# EAGLE board PCB (EAGLE 9.7.0)
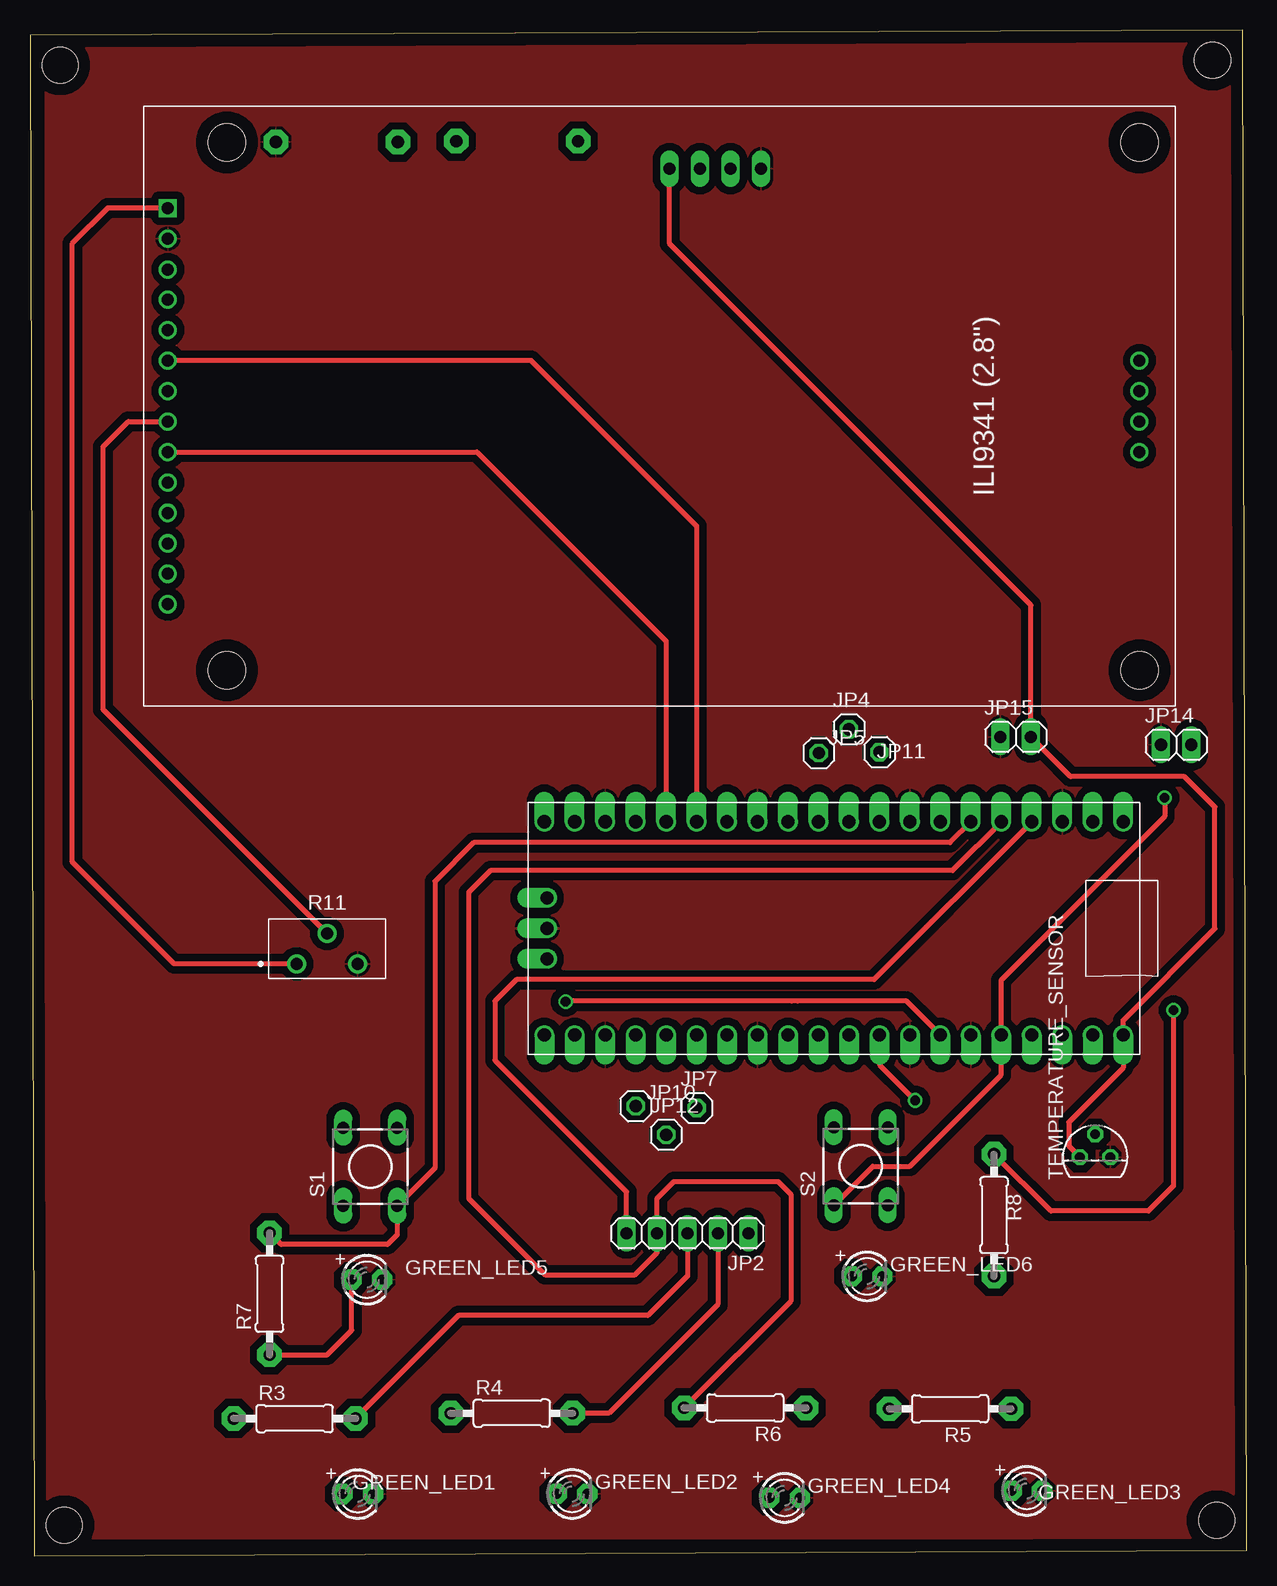
[diagram p0: board, top side]
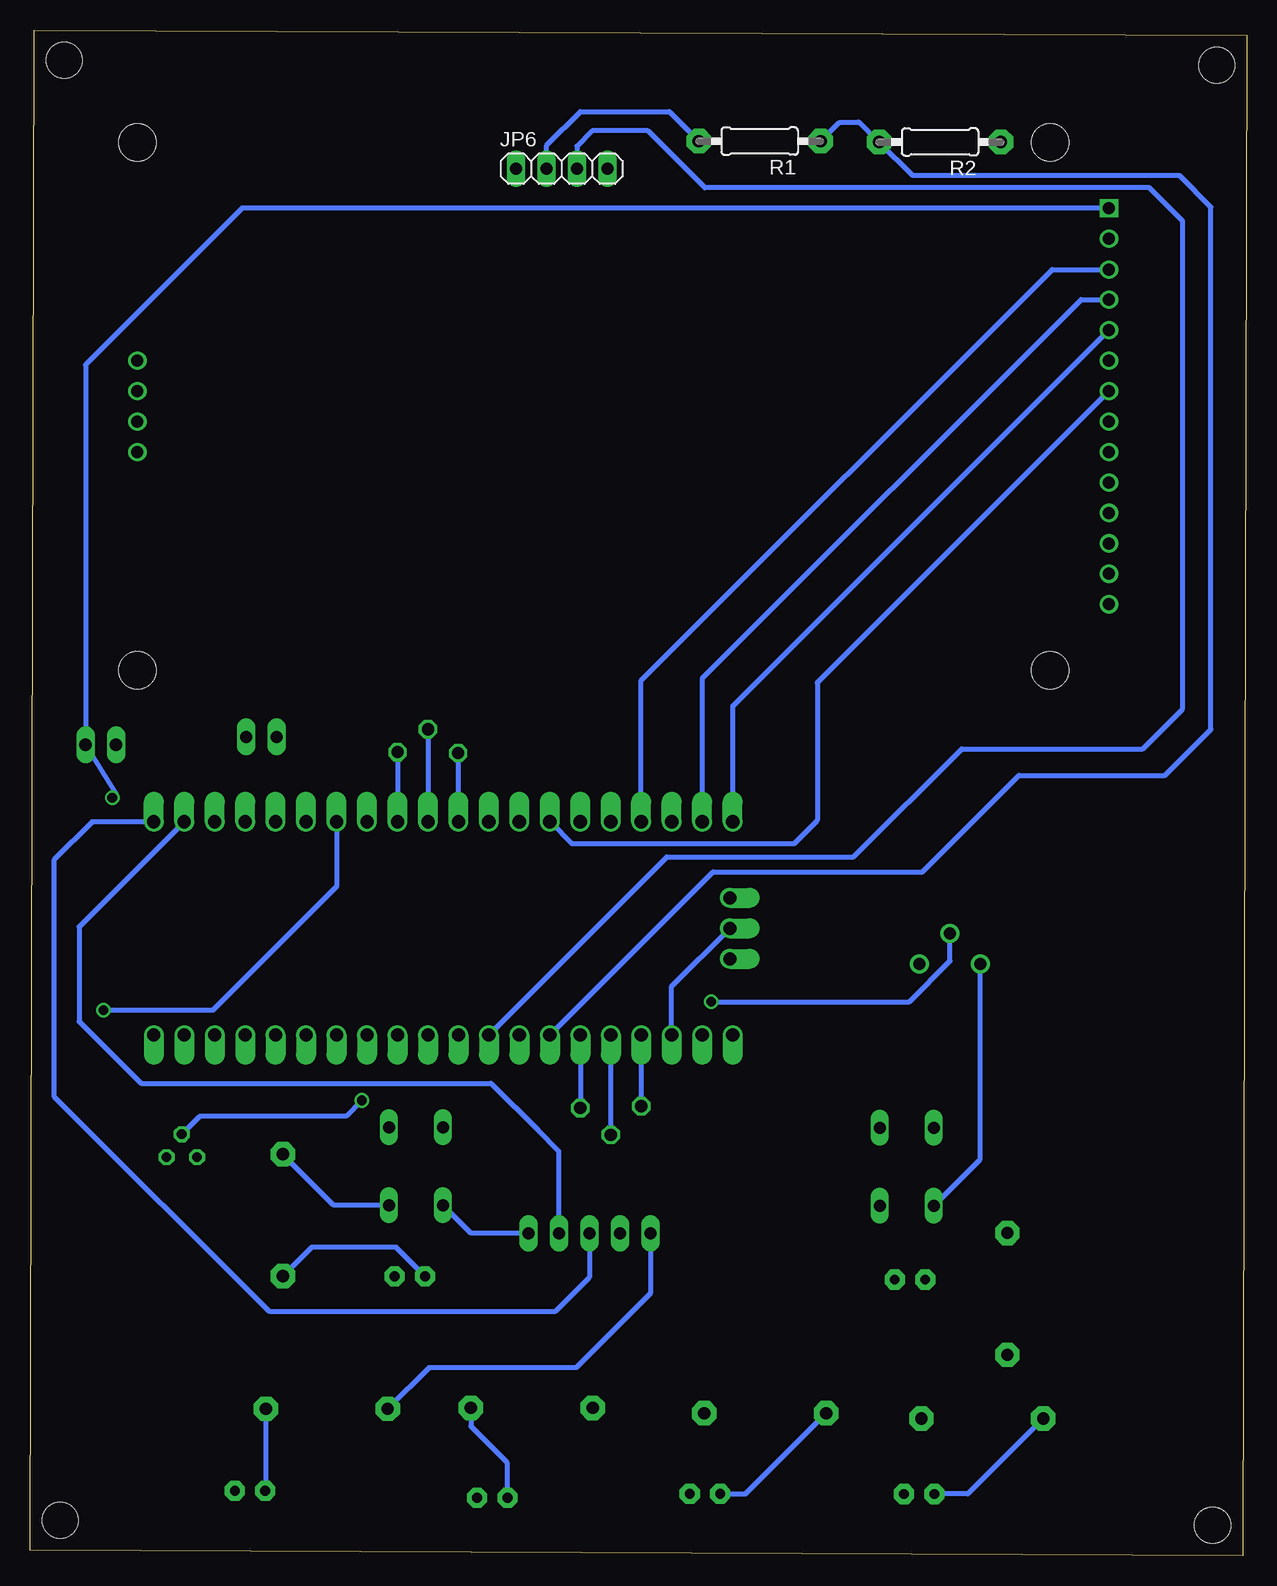
[diagram p1: board, bottom side, seen from below]

Size 101.45 x 127.18 mm. Coordinates in mm from the lower left corner, seen from the top.
Outline: 0.36,0 101.45,0.43 101.1,127.18 0,126.75 0.36,0
Copper layers (1*16): Top / Bottom
Stack-up 2 Layer Stack: Top SilkScreen Epoxy Ink / Top SolderMask User Defined 0.0254mm Dk 4.3 / Top Surface Finish Lead-Free 0.02mm / Top CuFoil:007 0.035mm / Dielectric-1 User Defined 0.79mm / Bottom CuFoil:007 0.035mm / Bottom Surface Finish Lead-Free 0.02mm / Bottom SolderMask User Defined 0.0254mm Dk 4.3 / Bottom SilkScreen Epoxy Ink
Design rules "default *": minimum track width 16mil, minimum drill 32mil, track to track 24mil, track to pad 24mil, pad to pad 24mil, via to via 24mil, smd to smd 24mil, copper to edge 40mil, drill to drill 20mil, minimum pad ring 10mil, minimum via ring 8mil, stop-mask expansion 4mil, vias tented up to drill 0mil, thermal gap 10mil
Holes 3 mm at 2.52,124.24 2.86,2.53 98.93,2.94 98.59,124.65

## Footprints (pad centres in the part's own frame; a part is rotated, then mirrored left to right if it is on the bottom)
LED3MM = drill 0.813 pad 1.676 octagon: A -1.27,0; K 1.27,0
1X05 = drill 1.016 long: 1 -5.08,0; 2 -2.54,0; 3 0,0; 4 2.54,0; 5 5.08,0
1X01 = drill 1.016 octagon: 1 0,0
1X04 = drill 1.016 long: 1 -3.81,0; 2 -1.27,0; 3 1.27,0; 4 3.81,0
1X02 = drill 1.016 long: 1 -1.27,0; 2 1.27,0
ILI9341 = drill 1: CS 13.6,2; D/C 18.65,2; GND 11.03,2; LED 26.27,2; RESET 16.11,2; SCK 23.73,2; SD_CS 21.19,83; SD_MISO 26.27,83; SD_MOSI 23.73,83; SD_SCK 28.81,83; SDI(MOSI) 21.19,2; SDO(MISO) 28.81,2; T_CLK 31.35,2; T_CS 33.89,2; T_DIN 36.43,2; T_DO 38.97,2; T_IRQ 41.51,2 | drill 1 square: VCC 8.49,2 | hole 3.1: 3,6.92; 47,6.92; 47,83; 3,83
0207/10 = drill 1.016 pad 2.032 octagon: 1 -5.08,0; 2 5.08,0
PV36Y = drill 1 pad 1.564: 1 0,0; 2 2.54,2.54; 3 5.08,0
RPI_PICO_TH = drill 1.1 pad 1.6 offset: 3V3 8.89,13.97; 3V3_EN 8.89,16.51; ADC_VREF 8.89,11.43; AGND 8.89,6.35; GND@1 -8.89,19.05; GND@2 -8.89,6.35; GND@3 -8.89,-6.35; GND@4 -8.89,-19.05; GND@5 0,-23.9; GND@6 8.89,-19.05; GND@7 8.89,-6.35; GND@8 8.89,19.05; GP0 -8.89,24.13; GP1 -8.89,21.59; GP2 -8.89,16.51; GP3 -8.89,13.97; GP4 -8.89,11.43; GP5 -8.89,8.89; GP6 -8.89,3.81; GP7 -8.89,1.27; GP8 -8.89,-1.27; GP9 -8.89,-3.81; GP10 -8.89,-8.89; GP11 -8.89,-11.43; GP12 -8.89,-13.97; GP13 -8.89,-16.51; GP14 -8.89,-21.59; GP15 -8.89,-24.13; GP16 8.89,-24.13; GP17 8.89,-21.59; GP18 8.89,-16.51; GP19 8.89,-13.97; GP20 8.89,-11.43; GP21 8.89,-8.89; GP22 8.89,-3.81; GP26_A0 8.89,1.27; GP27_A1 8.89,3.81; GP28_A2 8.89,8.89; RUN 8.89,-1.27; SWCLK -2.54,-23.9; SWDIO 2.54,-23.9; VBUS 8.89,24.13; VSYS 8.89,21.59
DTS-6 = drill 1 long: 1 -3.25,2.25; 2 3.25,2.25; 3 -3.25,-2.25; 4 3.25,-2.25
TO92 = drill 0.813 octagon: 1 -1.27,0; 2 0,1.905; 3 1.27,0

## Placement (x,y rotation side)
GREEN_LED1  3MM_LED_TH  [LED3MM]  27.32,5.14 0 top
GREEN_LED2  3MM_LED_TH  [LED3MM]  45.19,5.16 0 top
GREEN_LED3  3MM_LED_TH  [LED3MM]  83.11,5.41 0 top
GREEN_LED4  3MM_LED_TH  [LED3MM]  62.92,4.83 0 top
GREEN_LED5  3MM_LED_TH  [LED3MM]  28.09,23.01 0 top
GREEN_LED6  3MM_LED_TH  [LED3MM]  69.78,23.29 0 top
JP2  PINHD-1X5  [1X05]  54.81,26.87 180 top
JP4  PINHD-1X1  [1X01]  68.28,68.88 0 top
JP5  PINHD-1X1  [1X01]  65.76,66.9 0 top
JP6  PINHD-1X4  [1X04]  57.12,115.62 0 bottom
JP7  PINHD-1X1  [1X01]  55.58,37.31 0 top
JP10  PINHD-1X1  [1X01]  50.5,37.47 0 top
JP11  PINHD-1X1  [1X01]  70.82,66.98 0 top
JP12  PINHD-1X1  [1X01]  53.04,35.08 0 top
JP14  PINHD-1X2  [1X02]  95.55,67.59 0 top
JP15  PINHD-1X2  [1X02]  82.17,68.25 0 top
LCD_SCREEN  ILI9341  [ILI9341]  9.49,120.82 270 top
R1  10K  [0207/10]  40.62,117.91 180 bottom
R2  10K  [0207/10]  25.58,117.84 180 bottom
R3  10k  [0207/10]  22.06,11.43 0 top
R4  10K  [0207/10]  40.16,11.87 0 top
R5  10K  [0207/10]  76.71,12.24 180 top
R6  10k  [0207/10]  59.62,12.32 180 top
R7  10k  [0207/10]  19.97,21.82 90 top
R8  10k  [0207/10]  80.37,28.38 90 top
R11  [PV36Y]  22.22,49.33 0 top
RASPBERRY_PI_PICO  [RPI_PICO_TH]  67.01,52.29 270 top
S1  DTS-6  [DTS-6]  28.36,32.41 90 top
S2  DTS-6  [DTS-6]  69.27,32.46 90 top
TEMPERATURE_SENSOR  LM35CZ  [TO92]  88.8,33.22 0 top

## Library data of the parts
GREEN_LED1-GREEN_LED6 R1-R8 = BASIC_Components
JP2 JP4-JP7 JP10-JP12 JP14 JP15 = Connector; CATEGORY: CONNECTOR; SUB-CATEGORY: PIN-HEADER
LCD_SCREEN = ILI9341
R11 = Resistor; CATEGORY: Resistor; DESCRIPTION: Lead Sealed Type Multiturn PV36 Series; MANUFACTURER: BOURNS; MPN: PV36Y; OPERATING_TEMPERATURE: -55 to +125 °C; PART_STATUS: Active; ROHS_COMPLIANCE: ROHS Compliant; SERIES: PV36; SUB-CATEGORY: Trimpot; TYPE: Lead Sealed
RASPBERRY_PI_PICO = RaspberryPi_Pico
S1 S2 = switch-tact
TEMPERATURE_SENSOR = lm35

## Nets
GP6: JP11.1 RASPBERRY_PI_PICO.GP6
GP7: JP4.1 RASPBERRY_PI_PICO.GP7
GP8: JP5.1 RASPBERRY_PI_PICO.GP8
GP9: RASPBERRY_PI_PICO.GP9
GP18: JP10.1 RASPBERRY_PI_PICO.GP18
GP19: JP12.1 RASPBERRY_PI_PICO.GP19
GP20: JP7.1 RASPBERRY_PI_PICO.GP20
GP26: RASPBERRY_PI_PICO.GP26_A0
GP28: LCD_SCREEN.LED R11.2 RASPBERRY_PI_PICO.GP28_A2
GP_3V3_EN: RASPBERRY_PI_PICO.3V3_EN
N$2: JP6.2 R1.2
N$5: GREEN_LED4.A R6.1
N$7: GREEN_LED3.A R5.1
N$9: GREEN_LED2.A R4.1
N$10: GREEN_LED1.A R3.1
N$12: GREEN_LED5.A R7.1
N$23: GREEN_LED6.A R8.1
PIN_RUN: RASPBERRY_PI_PICO.RUN
PUSH_BUTTON_1: R7.2 RASPBERRY_PI_PICO.GP4 S1.3
PUSH_BUTTON_2: R8.2 RASPBERRY_PI_PICO.GP5 S2.3
SWITCH_1: JP2.3 R3.2 RASPBERRY_PI_PICO.GP0
SWITCH_2: JP2.2 R4.2 RASPBERRY_PI_PICO.GP1
SWITCH_3: JP2.5 R5.2 RASPBERRY_PI_PICO.GP2
SWITCH_4: JP2.4 R6.2 RASPBERRY_PI_PICO.GP3
T_3.3V: JP2.1 JP14.2 LCD_SCREEN.VCC R11.1 RASPBERRY_PI_PICO.3V3 S1.1 S2.1
T_CS: LCD_SCREEN.CS RASPBERRY_PI_PICO.GP13
T_D/C: LCD_SCREEN.D/C RASPBERRY_PI_PICO.GP15
T_ECHO: R1.1 R2.2 RASPBERRY_PI_PICO.GP21
T_GND: GREEN_LED1.K GREEN_LED2.K GREEN_LED3.K GREEN_LED4.K GREEN_LED5.K GREEN_LED6.K JP6.1 JP14.1 JP15.1 LCD_SCREEN.GND R2.1 R11.3 RASPBERRY_PI_PICO.ADC_VREF RASPBERRY_PI_PICO.AGND RASPBERRY_PI_PICO.GND@1 RASPBERRY_PI_PICO.GND@2 RASPBERRY_PI_PICO.GND@3 RASPBERRY_PI_PICO.GND@4 RASPBERRY_PI_PICO.GND@5 RASPBERRY_PI_PICO.GND@6 RASPBERRY_PI_PICO.GND@7 RASPBERRY_PI_PICO.GND@8 TEMPERATURE_SENSOR.3
T_LCD_RESET: LCD_SCREEN.RESET RASPBERRY_PI_PICO.GP14
T_LCD_SCK: LCD_SCREEN.SCK RASPBERRY_PI_PICO.GP10
T_MISO: LCD_SCREEN.SDO(MISO) RASPBERRY_PI_PICO.GP12
T_MOSI: LCD_SCREEN.SDI(MOSI) RASPBERRY_PI_PICO.GP11
T_SCL: RASPBERRY_PI_PICO.GP17
T_SDA: RASPBERRY_PI_PICO.GP16
T_TEMP: RASPBERRY_PI_PICO.GP27_A1 TEMPERATURE_SENSOR.2
T_TRIG: JP6.3 RASPBERRY_PI_PICO.GP22
V_5V: JP6.4 JP15.2 RASPBERRY_PI_PICO.VBUS TEMPERATURE_SENSOR.1

## Tracks (layer width: path | path; a pad name or v marks a point on that pad's centre or on a via)
GP6
  Bottom 0.406: JP11.1 RASPBERRY_PI_PICO.GP6
GP7
  Bottom 0.406: JP4.1 RASPBERRY_PI_PICO.GP7
GP8
  Bottom 0.406: JP5.1 65.74,66.89 RASPBERRY_PI_PICO.GP8
GP18
  Bottom 0.406: RASPBERRY_PI_PICO.GP18 JP10.1
GP19
  Bottom 0.406: JP12.1 RASPBERRY_PI_PICO.GP19
GP20
  Bottom 0.406: RASPBERRY_PI_PICO.GP20 JP7.1
GP28  (via drill 0.81)
  Top 0.406: LCD_SCREEN.LED 8.19,94.55 6.1,92.45 6.1,70.54 R11.2 | v44.65,46.18 44.7,46.23 63.5,46.23 63.98,46.23 73.06,46.23 RASPBERRY_PI_PICO.GP28_A2
  Bottom 0.406: v44.65,46.18 28.14,46.18 24.77,49.56 R11.2
N$2
  Bottom 0.406: JP6.2 58.42,115.65 58.42,117.52 55.57,120.37 48.15,120.37 R1.2
N$5
  Bottom 0.406: R6.1 64.7,10.8 61.65,7.74 GREEN_LED4.A
N$7
  Bottom 0.406: R5.1 81.79,5.46 GREEN_LED3.A
N$9
  Bottom 0.406: GREEN_LED2.A 41.8,5.16 R4.1
N$10
  Bottom 0.406: R3.1 23.27,5.14 GREEN_LED1.A
N$12
  Top 0.406: R7.1 24.77,16.74 26.82,18.8 GREEN_LED5.A
N$23
  Bottom 0.406: GREEN_LED6.A 70.93,25.7 77.97,25.7 R8.1
PUSH_BUTTON_1
  Top 0.406: R7.2 20.94,25.93 29.79,25.93 30.61,26.75 S1.3 33.76,32.31 33.76,56.21 36.98,59.44 76.7,59.44 RASPBERRY_PI_PICO.GP4
PUSH_BUTTON_2  (via drill 0.81)
  Top 0.406: v95.33,45.47 95.33,30.81 93.24,28.73 85.11,28.73 R8.2
  Bottom 0.406: RASPBERRY_PI_PICO.GP5 75.9,55.78 86.21,45.47 v95.33,45.47 | S2.3 76.12,29.21 R8.2
SWITCH_1
  Top 0.406: R3.2 35.73,20.02 51.51,20.02 54.81,23.32 JP2.3
  Bottom 0.406: RASPBERRY_PI_PICO.GP0 96.27,61.18 99.47,57.99 99.47,38.3 81.53,20.37 57.66,20.37 54.81,23.22 JP2.3
SWITCH_2
  Top 0.406: JP2.2 57.35,20.96 48.26,11.87 R4.2
  Bottom 0.406: RASPBERRY_PI_PICO.GP1 97.36,52.41 97.36,44.53 92.2,39.37 63.02,39.37 59.12,35.47 57.35,33.71 JP2.2
SWITCH_3
  Top 0.406: RASPBERRY_PI_PICO.GP2 70.37,48.03 40.56,48.03 38.76,46.23 38.76,41.3 49.73,30.33 JP2.5
  Bottom 0.406: R5.2 68.2,15.67 57.91,15.67 57.48,15.67 55.93,15.67 49.73,21.87 JP2.5
SWITCH_4
  Top 0.406: R6.2 63.42,21.2 63.42,30.12 62.36,31.19 53.67,31.19 52.27,29.79 JP2.4 52.27,25.25 50.44,23.42 42.93,23.42 36.58,29.77 36.58,55.3 38.38,57.1 76.9,57.1 RASPBERRY_PI_PICO.GP3
T_3.3V  (via drill 0.81)
  Top 0.406: v94.59,63.17 94.59,61.6 80.98,47.98 RASPBERRY_PI_PICO.3V3 80.98,40.08 73.34,32.45 70.26,32.45 S2.1 | LCD_SCREEN.VCC 6.47,112.33 3.53,109.39 3.53,57.81 12.01,49.33 R11.1
  Bottom 0.406: S1.1 22.23,33.05 R11.1 | S2.1 64.72,26.92 64.68,26.87 JP2.1 | v94.59,63.17 94.29,63.47 JP14.2 96.83,99.28 83.78,112.33 LCD_SCREEN.VCC
T_CS
  Bottom 0.406: LCD_SCREEN.CS 16.23,107.22 50.5,72.95 RASPBERRY_PI_PICO.GP13
T_D/C
  Bottom 0.406: LCD_SCREEN.D/C 42.88,70.79 RASPBERRY_PI_PICO.GP15
T_ECHO
  Bottom 0.406: RASPBERRY_PI_PICO.GP21 44.52,57 27.05,57 19,65.05 6.83,65.05 3,68.88 3,112.43 5.62,115.05 27.87,115.05 R2.2 32.3,119.48 32.46,119.48 33.97,119.48 R1.1
T_GND
  Bottom 0.406: RASPBERRY_PI_PICO.GND@6 47.96,47.44 RASPBERRY_PI_PICO.GND@5
  pour Top: 1.22,1.37 100.48,1.37 100.48,126.19 1.22,126.19
T_LCD_RESET
  Bottom 0.406: LCD_SCREEN.RESET 13.81,104.71 45.42,73.1 RASPBERRY_PI_PICO.GP14
T_LCD_SCK
  Bottom 0.406: RASPBERRY_PI_PICO.GP10 57.99,61.05 56.3,59.36 37.74,59.36 35.81,61.29 35.81,72.77 LCD_SCREEN.SCK
T_MISO
  Top 0.406: LCD_SCREEN.SDO(MISO) 37.26,92.01 53.04,76.23 RASPBERRY_PI_PICO.GP12
T_MOSI
  Top 0.406: LCD_SCREEN.SDI(MOSI) 41.78,99.63 55.58,85.83 RASPBERRY_PI_PICO.GP11
T_TEMP  (via drill 0.81)
  Top 0.406: RASPBERRY_PI_PICO.GP27_A1 70.82,40.92 v73.79,37.95
  Bottom 0.406: v73.79,37.95 75.11,36.63 87.3,36.63 TEMPERATURE_SENSOR.2
T_TRIG
  Bottom 0.406: RASPBERRY_PI_PICO.GP22 48.35,58.24 32.79,58.24 23.77,67.26 8.69,67.26 5.36,70.59 5.36,111.25 8.14,114.03 45.2,114.03 49.94,118.77 54.58,118.77 55.85,117.5 JP6.3
V_5V
  Top 0.406: JP6.4 53.31,109.35 83.44,79.22 JP15.2 86.74,64.95 96.24,64.95 98.78,62.41 98.78,52.26 91.14,44.62 RASPBERRY_PI_PICO.VBUS 91.14,40.67 86.59,36.12 86.59,34.16 TEMPERATURE_SENSOR.1